# Altium PCB PCB2.PcbDoc
Units mil, origin at the board's own origin, x right, y up, seen from the top; angles counter-clockwise.
Board outline 1750 x 1450 mil, 2 copper layers (Top Layer, Bottom Layer); 15 components, 11 nets, 41 pads, 0 vias.
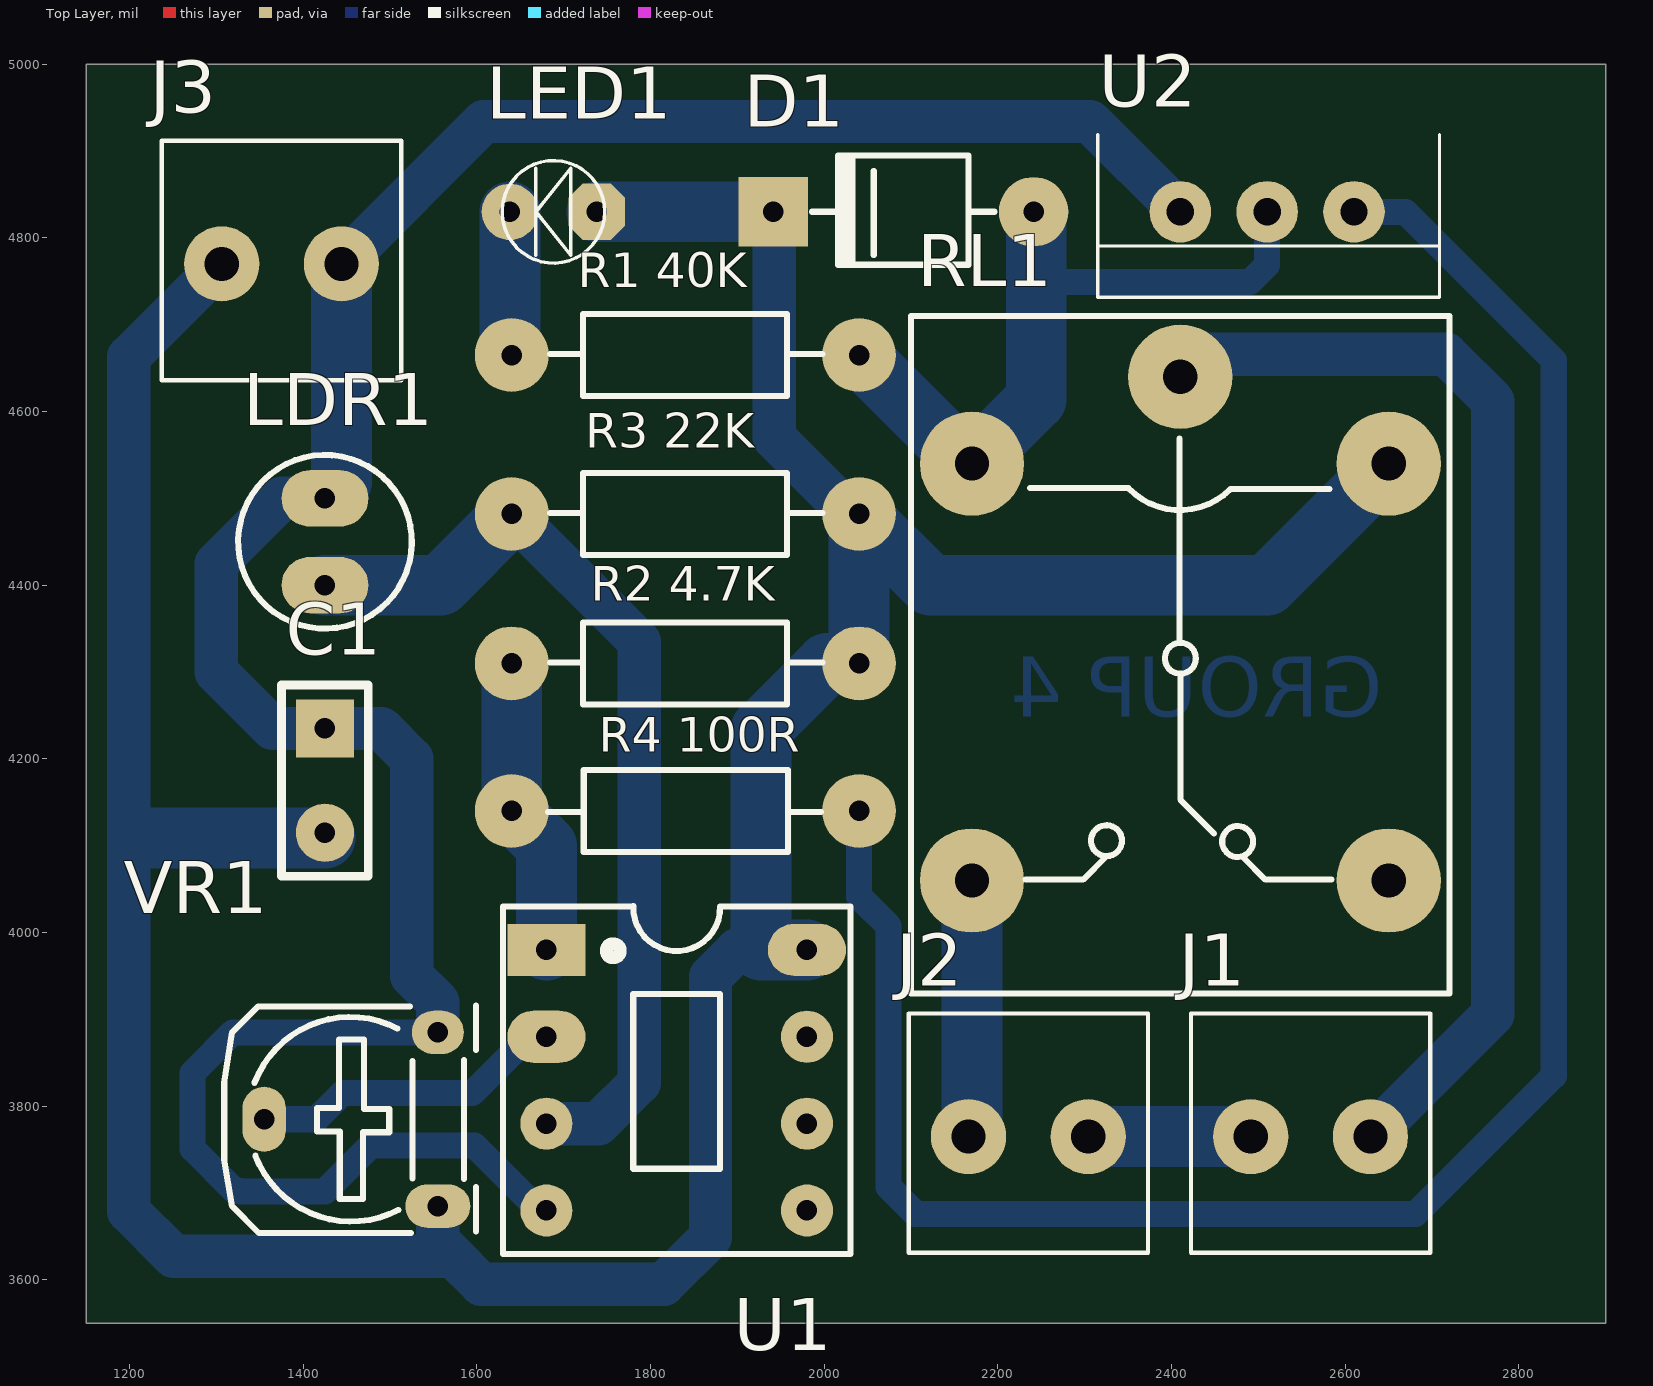
[diagram p0: Top Layer view]
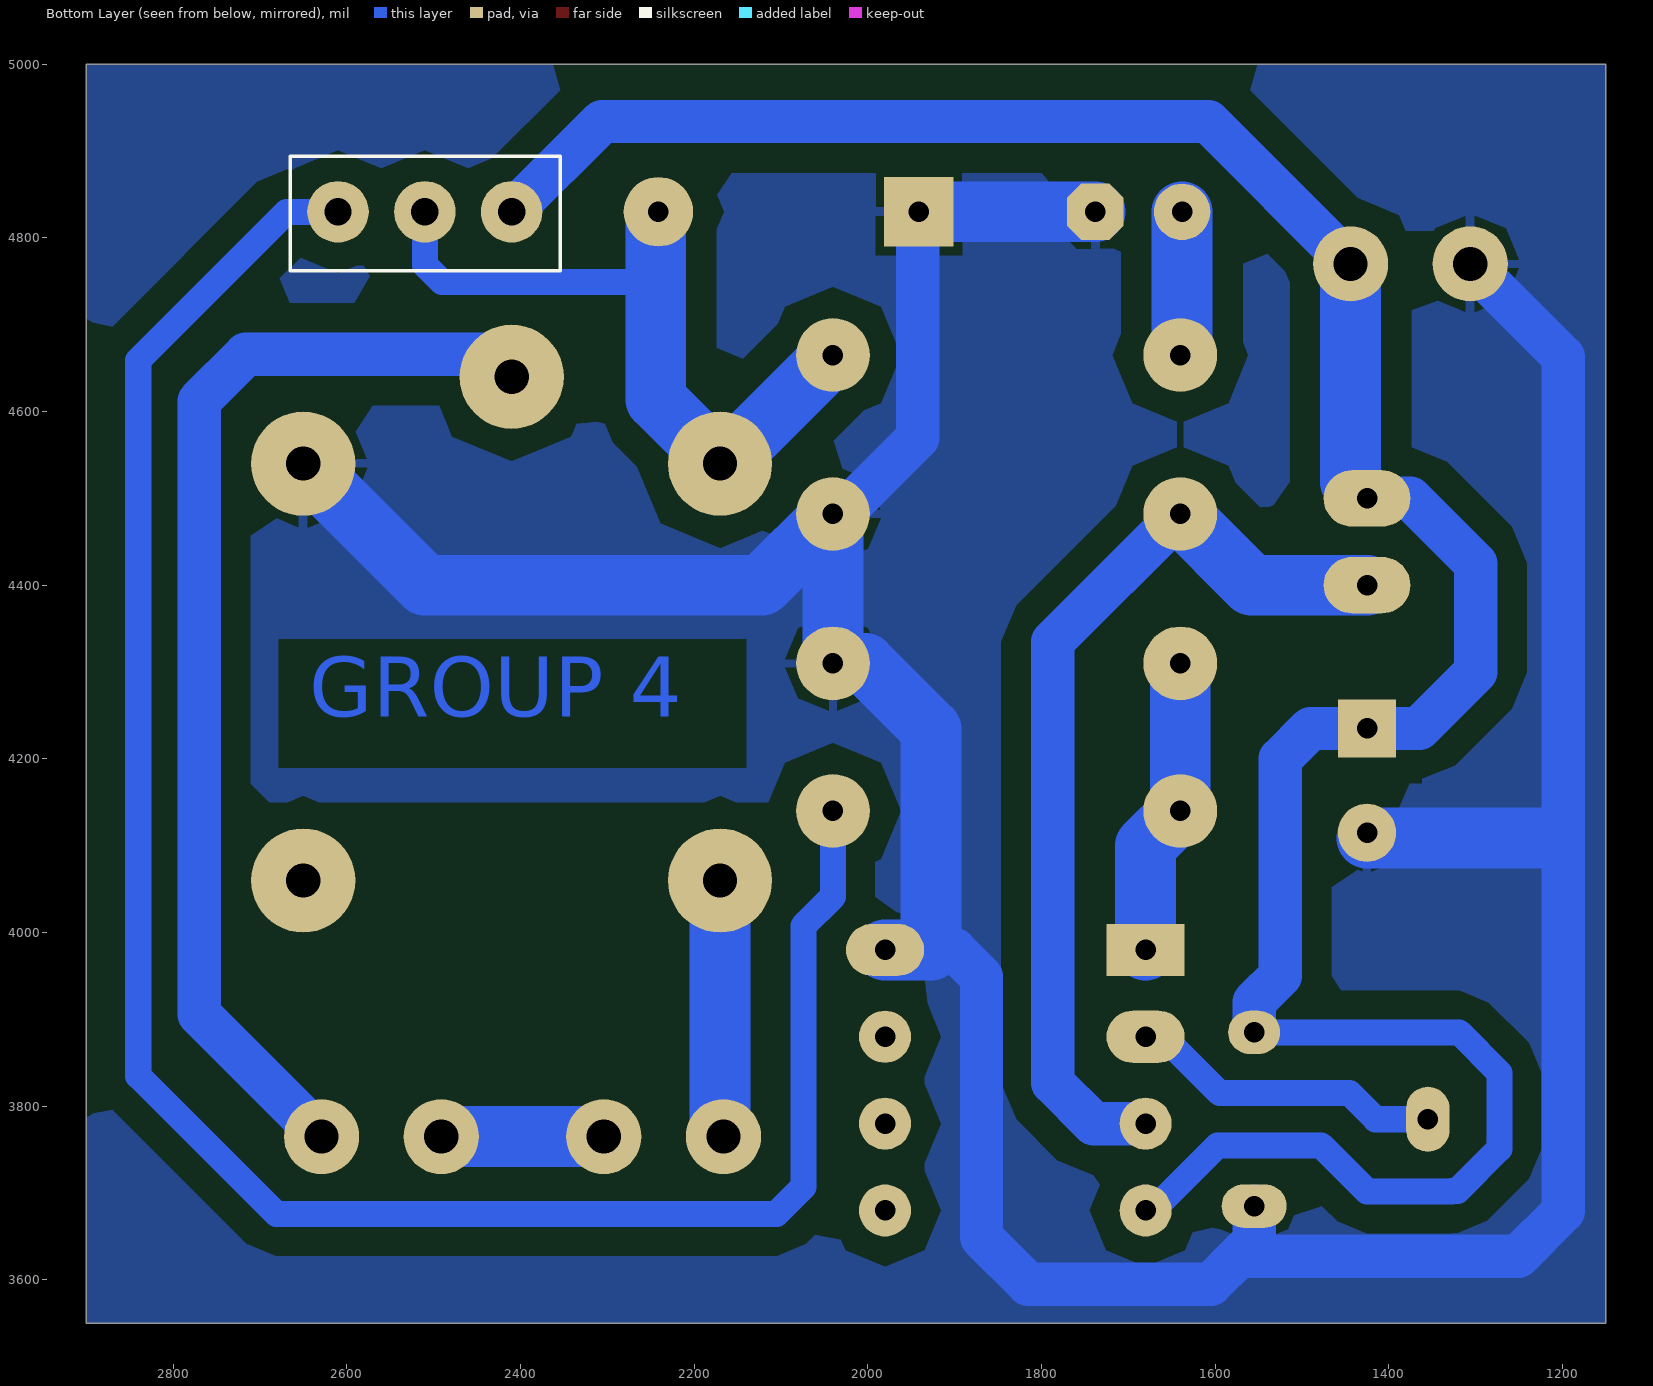
[diagram p1: Bottom Layer view, seen from below]
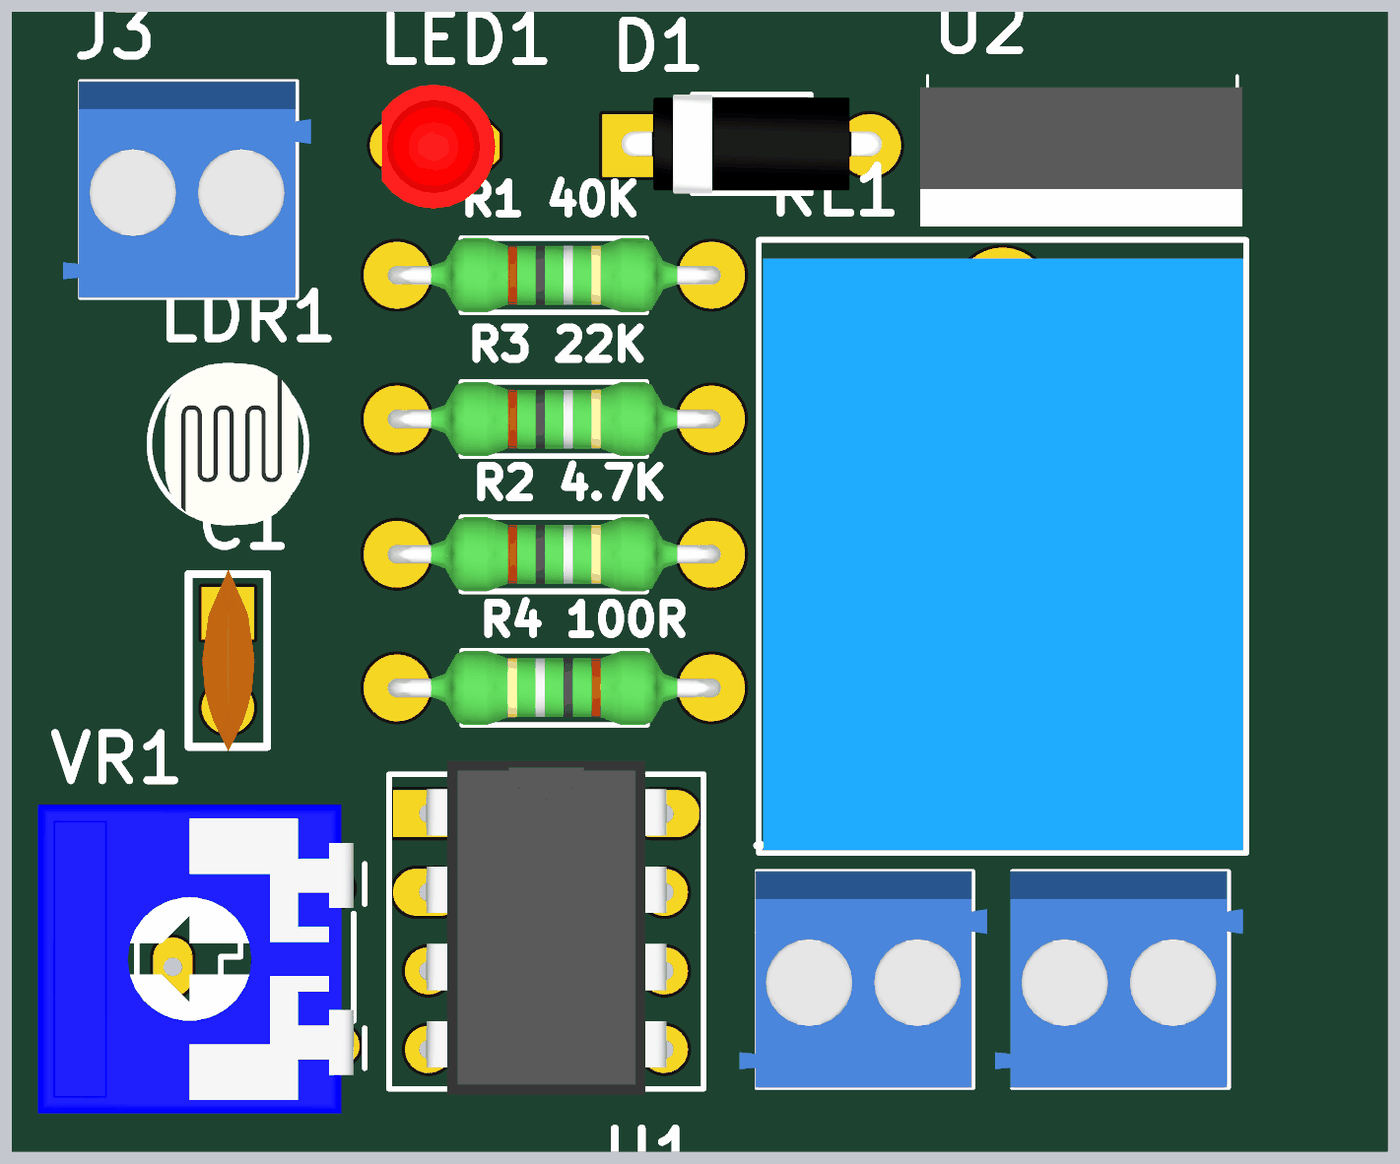
[diagram p2: 3D render of the assembled board from above, using the file's embedded part models]

## Layer stack, top to bottom
Top Solder: solder mask 0.4, Solder Resist, Dk 3.5
Top Layer: signal copper 1.4
Dielectric 1: dielectric 12.6, FR-4, Dk 4.8
Bottom Layer: signal copper 1.4
Bottom Solder: solder mask 0.4, Solder Resist, Dk 3.5

## Board outline
1150,3550 1150,5000 2900,5000 2900,3550

## Design rules (kind name [scope] priority, off if disabled: settings)
Clearance [All] p1: gap=30
PolygonConnect [All] p1: connectstyle=Relief reliefconductorwidth=10 reliefentries=4 polygonreliefangle="90 Angle" airgapwidth=10
RoutingLayers [All] p1: top layer_v5=FALSE bottom layer_v5=TRUE
RoutingVias [All] p1: holewidth=28 width=80 viastyle="Through Hole" minholewidth=28 minwidth=80 maxholewidth=28 maxwidth=80
SolderMaskExpansion [All] p1: expansion=4
Width [All] p1: maxlimit=80 minlimit=20 preferedwidth=30
29 further rules are at their usual default settings.

## Components (designator, comment, footprint, x,y, rotation, side; value= is the part's Value field where it differs from the comment)
C1 "Cap Non-pol" "Cap Non-Pol 3mm" 1425,4175 r270 top
D1 "Diode" DIO-1A-SMALL 2291,4830 r0 top
J1 "KF2" KF2-3.5 2560,3765 r180 top
J2 "KF2" KF2-3.5 2235,3765 r180 top
J3 "KF2" KF2-3.5 1375,4770 r180 top
LDR1 "LDR" CDS 1425,4500 r270 top
LED1 "LED" LED-3MM-RED 1738,4830 r180 top
"R1 40K" "1K" RES-1/4W 1825,4670 r180 top (schematic designator R1)
"R2 4.7K" "4,7k" RES-1/4W 1825,4315 r180 top (schematic designator R2)
"R3 22K" "22k" RES-1/4W 1825,4487 r180 top (schematic designator R3)
"R4 100R" "100R" RES-1/4W 1855,4135 r0 top (schematic designator R4)
RL1 "Relay 5V" "RELAY 5" 2410,4315 r270 top
U1 "LM393" DIP8 1830,3835 r270 top
U2 "IRF540_1" TO-220N 2610,4830 r90 top
VR1 "20K" VR-S2 1555,3685 r90 top

## Footprints (in the part's own frame and the unit in brackets; to place one, negate y for a bottom-side part, rotate by r counter-clockwise, add the part's x,y. Pads: shape width x height; smd on the part's side, far side on the other; paste and mask are expansions set on the pad)
"Cap Non-Pol 3mm" [mil] "Capacitor, Radial; Body 5.6 x 2.5 mm (L x W typ); Pin Spacing 3 mm (typ); Solder Pad 35mil"
  rect 67x67 hole 23.62: 1(-60,0)
  round 67 hole 23.62: 2(60,0)
  silkscreen extent -110,-50 110,50, body extent -115,-33 115,34, height 245
CDS [mil] "QUANG TRO"
  oval 65x100 hole 23.62: 1(0,0) 2(100,0)
  silkscreen extent -50,-100 150,100, body extent -53,-80 153,89, height 138
DIO-1A-SMALL [mil] "Diode 1A, W 100mil, L 350mil"
  round 80 hole 23.62: 1(-50,0)
  rect 80x80 hole 23.62: 2(-350,0)
  silkscreen extent -305,-61 -95,65, body extent -366,-61 -34,65, height 122
DIP8 [mil] "DIP, 8-Leads, Row Spacing 7.62mm, Pitch 2.54mm, Body 9.91x6.73mm"
  rect 60x90 hole 23.62: 1(-145,-150)
  oval 60x90 hole 23.62: 2(-45,-150) 8(-145,150)
  round 60 hole 23.62: 3(55,-150) 4(155,-150) 5(155,150) 6(55,150) 7(-45,150)
  silkscreen extent -195,-200 205,200, body extent -213,-153 213,153, height 177
KF2-3.5 [mm] "3,50mm - modular - blue - Horizontal wire entry - Pressure clamp - 8,4mm height - 02p"
  round 2.2 hole 1: 1(-1.75,0) 2(1.75,0)
  silkscreen extent -3.5,-3.6 3.5,3.4, body extent -3.95,-3.6 4.05,3.4, height 8.41
LED-3MM-RED [mil]
  oct 65x65 hole 23.62: 1(0,0)
  round 65 hole 23.62: 2(100,0)
  silkscreen extent -9,-59 109,59, body extent -27,-77 117,80, height 181
"RELAY 5" [mil] "Reley DPDT, 8 pin, 1A, W400mil, L800mil,H 300mil"
  round 120 hole 39.37: 1(-325,0) 2(255,240) 3(255,-240) 4(-225,-240) 5(-225,240)
  silkscreen extent -395,-310 385,310, body extent -371,-304 381,306, height 602
RES-1/4W [mil]
  round 85 hole 23.62: 1(-215,5) 2(185,5)
  silkscreen extent -173,-42 141,52, body extent -227,-42 197,52, height 95
TO-220N [mm]
  round 1.8 hole 0.8: 1(0,0) 2(0,2.54) 3(0,5.08)
  silkscreen extent -2.5,-2.5 2.25,7.5, body extent -2.62,-2.67 1.88,7.73, height 18
VR-S2 [mm] "Resistor Variable"
  oval 1.27x1.905 hole 0.6: 1(0,0)
  oval 1.905x1.27 hole 0.6: 2(2.54,5.08)
  oval 1.27x1.524 hole 0.6: 3(5.08,0)
  silkscreen extent -0.79,-1.12 5.87,6.25, body extent -2.21,-0.76 7.79,9.44, height 4.2

## Part data
C1: "Non-polarized Capacitor"
D1: "Default Diode"
LDR1: "Quang Tro"
LED1: "LED Single colour Green and Red"
"R1 40K" "R2 4.7K" "R3 22K" "R4 100R": library part Res, "Res"
RL1: library part "Relay 5", "Relay SPDT,10A - 12VDC 5 Pin"
U1: "IC DUAL COMPARATOR"
U2: "IRF9540 - N-CHANNEL POWER MOSFETS"
VR1: library part VR-S, "Var Resistor"

## Nets (pads, with @x,y where several pads share a name; then routed paths per layer and width w, separated by ;. In a path a pad name is that pad's centre, name@x,y a point inside that pad or via, vN(x,y) a via of type N, cw(c..) or ccw(c..) an arc to the next point about the centre after c; other vN are vias at no path point)
GND: C1.1 J3.1 LDR1.1 U1.4 U2.3 VR1.3 | length 3097.7
  Bottom Layer w30: VR1.3 1319,3885 1272.5,3838.5 1272.5,3750.83 1320.83,3702.5 1327.5,3702.5 1328,3702 1425,3702 1478,3755 1597,3755 U1.4@1676,3676
  Bottom Layer w50: LDR1.1@1443.9,4518.9 LDR1.1 1375,4500 1300,4425 1300,4300 1365,4235 C1.1 1490,4235 1525,4200 1525,3950 1555,3920 VR1.3 ; J3.1 1607.9,4934 2306,4934 U2.3
  Bottom Layer w70: LDR1.1@1443.9,4518.9 J3.1
NetD1_1: "R1 40K.1" D1.1 RL1.4 U2.2 | length 841.3
  Bottom Layer w30: RL1.4@2165,4540 RL1.4 ; 2245,4749 2490,4749 2510,4769 U2.2
  Bottom Layer w50: D1.1@2244,4819 D1.1@2255,4830
  Bottom Layer w70: 2040,4665 RL1.4@2165,4540 ; RL1.4 2244,4614 D1.1@2244,4819
NetJ1_1: J1.1 RL1.1 | length 1298.6
  Bottom Layer w50: RL1.1 2436,4666 2716,4666 2770,4612 2770,3906.1 J1.1
NetJ1_2: J1.2 J2.1 | length 187.2
  Bottom Layer w70: J2.1 J1.2
NetJ2_2: J2.2 RL1.3 | length 296.6
  Bottom Layer w50: J2.2 J2.2@2170,3768.9
  Bottom Layer w70: J2.2@2170,3768.9 RL1.3
NetLDR1_2: "R3 22K.2" LDR1.2 U1.3 | length 1091.3
  Bottom Layer w50: 1640,4482 1787,4335 1787,3827 1740,3780 U1.3
  Bottom Layer w70: LDR1.2 1558,4400 1640,4482
NetLED1_2: "R1 40K.2" LED1.2 | length 165.8
  Bottom Layer w30: 1638,4667 1640,4665
  Bottom Layer w70: 1638,4667 LED1.2
NetR2_2: "R2 4.7K.2" "R4 100R.1" U1.1 | length 346.6
  Bottom Layer w70: 1640,4310 1640,4140 1680,4100 U1.1
NetR4_2: "R4 100R.2" U2.1 | length 2416.6
  Bottom Layer w30: 2040,4140 2040,4041.51 2074,4007.51 2074,3707 2105,3676 2681,3676 2840,3835 2840,4659 2669,4830 U2.1
NetU1_2: U1.2 VR1.2 | length 364.4
  Bottom Layer w20: U1.2@1662,3880 U1.2
  Bottom Layer w30: VR1.2 1415,3785 1445,3815 1594.42,3815 1659.42,3880 U1.2@1662,3880
VCC: "R2 4.7K.1" "R3 22K.1" C1.2 D1.2 J3.2 LED1.1 RL1.5 U1.8 VR1.1 | length 4479.5
  Bottom Layer w50: J3.2 1199,4662.9 1199,3679 1251,3627 1573,3627 ; VR1.1 1555,3645 1573,3627 ; D1.2@1942.5,4830 1942.5,4569.5 2030,4482 2040,4482 ; U1.8 1900,3980 1869,3949 1869,3649 1815,3595 1605,3595 1573,3627
  Bottom Layer w70: 1220,4109 C1.2@1425,4109 ; LED1.1 D1.2 ; U1.8 1927,3980 1927,4234 2003,4310 2040,4310 2040,4482 2122,4400 2510,4400 RL1.5
pads on no net: RL1.2 U1.5 U1.6 U1.7

## Polygon pours and split planes (outlines as drawn)
VCC on Bottom Layer "Mechanical 1-No Net" (solid, pour order 8): 1150,5000 2900,5000 2900,3550 1150,3550 1150,5000

## Other copper
Bottom Layer:
  pour cut-out: 1350,4350 1600,4350 1600,4250 1350,4250
  pour cut-out: 2227.05,4150 2750,4150 2750,3745 2705,3700 2150,3700 2100,3750 2100,4150
  text "GROUP 4" at 2643,4226 h118.11